# Altium PCB PCBRutero.PcbDoc
Units mil, origin at the board's own origin, x right, y up, seen from the top; angles counter-clockwise.
Board outline 6000 x 4000 mil, 2 copper layers (Top Layer, Bottom Layer); 66 components, 49 nets, 534 pads, 0 vias.
Unrouted connection lines stored in the file: 166.
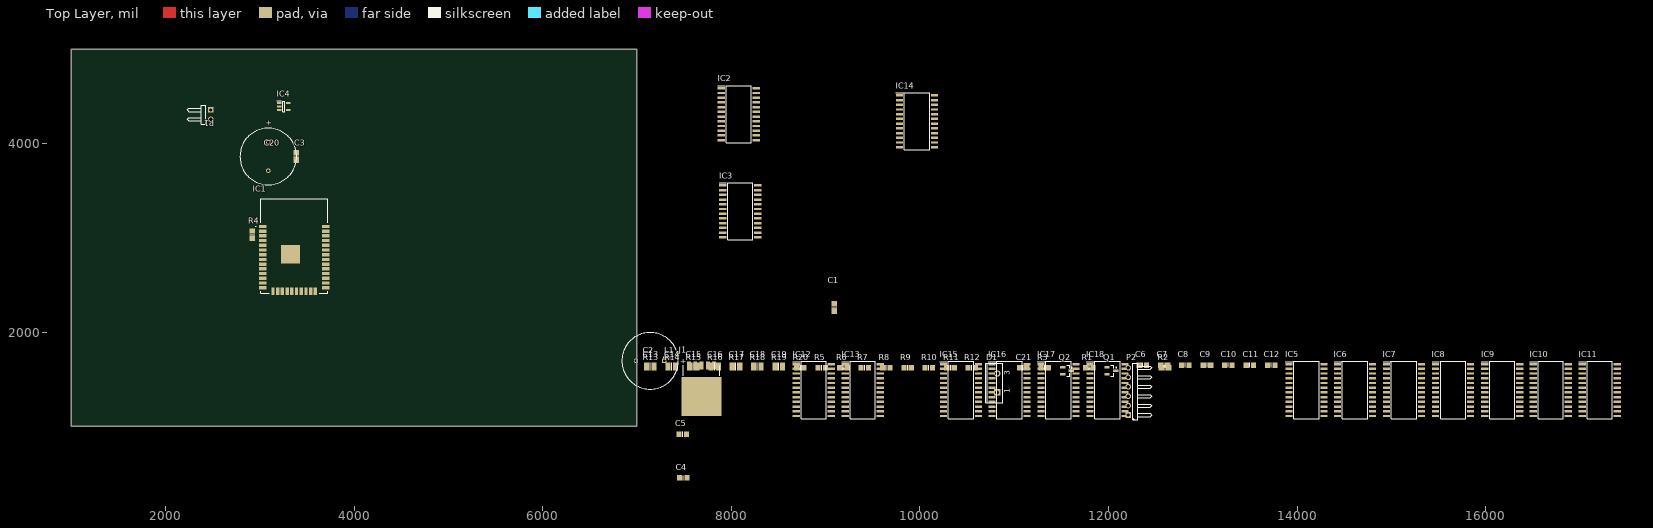
[diagram p0: Top Layer view]
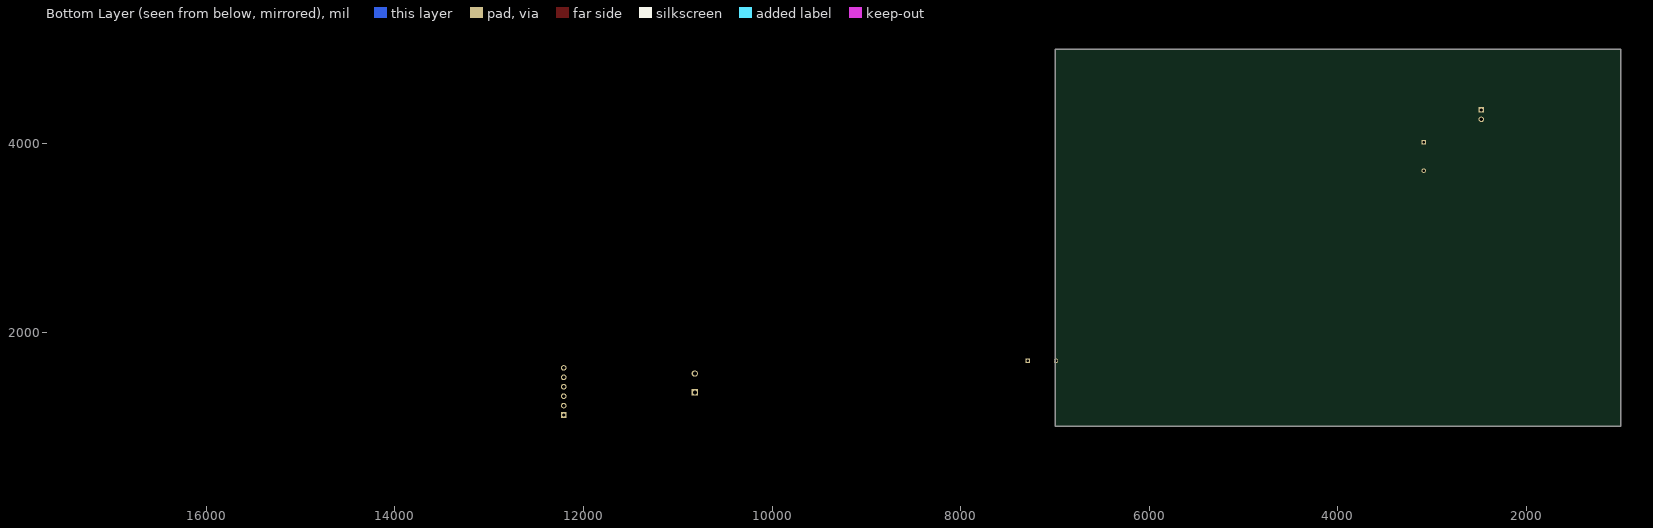
[diagram p1: Bottom Layer view, seen from below]

## Layer stack, top to bottom
Top Solder: solder mask 0.4, Solder Resist, Dk 3.5
Top Layer: signal copper 1.4
Dielectric 1: dielectric 12.6, FR-4, Dk 4.8
Bottom Layer: signal copper 1.4
Bottom Solder: solder mask 0.4, Solder Resist, Dk 3.5

## Board outline
1000,1000 7000,1000 7000,5000 1000,5000

## Design rules (kind name [scope] priority, off if disabled: settings)
Clearance Clearance_1 [All] p1: gap=10 ignorepadtopadclearanceinfootprint=FALSE except(0: Arc-Hole Track-Hole SMDPad-Hole THPad-Hole Via-Hole Fill-Hole Poly-Hole Region-Hole Text-Hole)
Clearance [All] p2: gap=10 ignorepadtopadclearanceinfootprint=FALSE except(0: Arc-Hole Track-Hole SMDPad-Hole THPad-Hole Via-Hole Fill-Hole Poly-Hole Region-Hole Text-Hole)
PolygonConnect [All] p1: connectstyle=Relief reliefconductorwidth=10 reliefentries=4 polygonreliefangle="90 Angle" airgapwidth=10
RoomDefinition Power [InComponentClass('Power')] p1: confinementstyle=ConfineOut formatcopy=TRUE lockcomponents=FALSE outline 3735,6510 8190,6510 8190,5410 3735,5410
RoomDefinition main [InComponentClass('main')] p2: confinementstyle=ConfineIn formatcopy=TRUE lockcomponents=FALSE outline 2988.59,3739.63 3975,3739.63 3975,2268.11 3924.75,2205 2740,2205 2740,3460.6 2972.72,3752.91
RoutingVias [All] p1: holewidth=28 width=50 viastyle="Through Hole" minholewidth=28 minwidth=50 maxholewidth=28 maxwidth=50
SolderMaskExpansion [All] p1: expansion=4
Width [All] p1: maxlimit=10 minlimit=10 preferedwidth=10
30 further rules are at their usual default settings.

## Classes and differential pairs
component class Matriz: IC5 IC6 IC7 IC8 IC9 IC10 IC11 IC12 IC13 IC14 IC15 IC16 IC17 IC18
component class Power: IC4

## Components (designator, comment, footprint, x,y, rotation, side; value= is the part's Value field where it differs from the comment)
C1 "Cap" 6-0805_M 9090.51,2260 r90 top value=0.1uF
C2 "Cap Pol1" RB7.6-15 7140,1695 r0 top value=1000uF
C3 "Cap" 6-0805_M 3385.67,3861.18 r90 top value=1uF
C4 "Cap" 6-0805_M 7490.35,452.91 r0 top value=0.1uF
C5 "Cap" 6-0805_M 7485.35,917.91 r0 top value=0.1uF
C6 "Cap" 6-0805_M 12365,1650 r0 top value=0.1uF
C7 "Cap" 6-0805_M 12590,1650 r0 top value=0.1uF
C8 "Cap" 6-0805_M 12815,1650 r0 top value=0.1uF
C9 "Cap" 6-0805_M 13045,1650 r0 top value=0.1uF
C10 "Cap" 6-0805_M 13270,1650 r0 top value=0.1uF
C11 "Cap" 6-0805_M 13500,1650 r0 top value=0.1uF
C12 "Cap" 6-0805_M 13725,1650 r0 top value=0.1uF
C13 "Cap" 6-0805_M 7140,1650 r0 top value=0.1uF
C14 "Cap" 6-0805_M 7370,1650 r0 top value=0.1uF
C15 "Cap" 6-0805_M 7595,1650 r0 top value=0.1uF
C16 "Cap" 6-0805_M 7825,1650 r0 top value=0.1uF
C17 "Cap" 6-0805_M 8050,1650 r0 top value=0.1uF
C18 "Cap" 6-0805_M 8275,1650 r0 top value=0.1uF
C19 "Cap" 6-0805_M 8505,1650 r0 top value=0.1uF
C20 "Cap Pol1" RB7.6-15 3090.67,3861.18 r90 top value=100uF
C21 "Cap" 6-0805_M 11095,1620 r0 top value=4.7uF
D1 "1N5824" TO-220AC 10820,1460 r90 top
IC1 "ESP-WROOM-32D" ESPWROOM32D 3365.35,2912.91 r0 top
IC2 "MAX7219CWG+T" SOIC127P1032X265-24N 8080,4310 r0 top
IC3 "MAX7219CWG+T" SOIC127P1032X265-24N 8095,3280 r0 top
IC4 "PTLV75733PDBVR" SOT95P280X145-5N 3254.21,4392.4 r0 top
IC5 "MAX7219CWG+T" SOIC127P1032X265-24N 14100,1385 r0 top
IC6 "MAX7219CWG+T" SOIC127P1032X265-24N 14615,1385 r0 top
IC7 "MAX7219CWG+T" SOIC127P1032X265-24N 15135,1385 r0 top
IC8 "MAX7219CWG+T" SOIC127P1032X265-24N 15655,1385 r0 top
IC9 "MAX7219CWG+T" SOIC127P1032X265-24N 16175,1385 r0 top
IC10 "MAX7219CWG+T" SOIC127P1032X265-24N 16690,1385 r0 top
IC11 "MAX7219CWG+T" SOIC127P1032X265-24N 17210,1385 r0 top
IC12 "MAX7219CWG+T" SOIC127P1032X265-24N 8875,1385 r0 top
IC13 "MAX7219CWG+T" SOIC127P1032X265-24N 9395,1385 r0 top
IC14 "MAX7219CWG+T" SOIC127P1032X265-24N 9970,4235 r0 top
IC15 "MAX7219CWG+T" SOIC127P1032X265-24N 10435,1385 r0 top
IC16 "MAX7219CWG+T" SOIC127P1032X265-24N 10950,1385 r0 top
IC17 "MAX7219CWG+T" SOIC127P1032X265-24N 11470,1385 r0 top
IC18 "MAX7219CWG+T" SOIC127P1032X265-24N 11990,1385 r0 top
J1 "LM2596S-5.0_TR" LM2596S50TR 7685,1480 r90 top
L1 "Inductor" 0402-A 7325,1730 r0 top value=33uH
P1 "Header 2H" HDR1X2H 2480,4355 r270 top
P2 "Header 6H" HDR1X6H 12210,1120 r90 top
Q1 "2N3904" SOT23_M 12030,1590 r0 top
Q2 "2N3904" SOT23_M 11560,1590 r0 top
R1 "Res1" 6-0805_M 11795,1620 r0 top value=10K
R2 "Res1" 6-0805_M 12600,1620 r0 top value=10K
R3 "Res1" 6-0805_M 11325,1620 r0 top value=10K
R4 "Res1" 6-0805_M 2919.84,3032.91 r90 top value=10K
R5 "Res1" 6-0805_M 8960,1620 r0 top value=10K
R6 "Res1" 6-0805_M 9190,1620 r0 top value=10K
R7 "Res1" 6-0805_M 9415,1620 r0 top value=10K
R8 "Res1" 6-0805_M 9645,1620 r0 top value=10K
R9 "Res1" 6-0805_M 9870,1620 r0 top value=10K
R10 "Res1" 6-0805_M 10095,1620 r0 top value=10K
R11 "Res1" 6-0805_M 10325,1620 r0 top value=10K
R12 "Res1" 6-0805_M 10550,1620 r0 top value=10K
R13 "Res1" 6-0805_M 7140,1620 r0 top value=10K
R14 "Res1" 6-0805_M 7370,1620 r0 top value=10K
R15 "Res1" 6-0805_M 7595,1620 r0 top value=10K
R16 "Res1" 6-0805_M 7825,1620 r0 top value=10K
R17 "Res1" 6-0805_M 8050,1620 r0 top value=10K
R18 "Res1" 6-0805_M 8275,1620 r0 top value=10K
R19 "Res1" 6-0805_M 8505,1620 r0 top value=10K
R20 "Res1" 6-0805_M 8730,1620 r0 top value=10K

## Footprints (in the part's own frame and the unit in brackets; to place one, negate y for a bottom-side part, rotate by r counter-clockwise, add the part's x,y. Pads: shape width x height; smd on the part's side, far side on the other; paste and mask are expansions set on the pad)
6-0805_M [mm] "Chip Resistor, Body 2.0x1.2mm, IPC Low Density"
  rect 1.4x1.5 smd: 1(-1,0) 2(1,0)
  silkscreen extent 0,-0.65 0,0.65, body extent -1.07,-0.7 1.07,0.7, height 0.7
0402-A [mm] "Chip Inductor, Body 1.0x0.5mm, IPC High Density"
  rect 0.6x0.5 smd: 1(-0.5,0) 2(0.5,0)
  silkscreen extent -1.1,-0.15 -1.1,0.15, body extent -0.55,-0.3 0.55,0.3, height 0.55
ESPWROOM32D [mm]
  rect 2x0.9 smd: 1(-8.5,5.26) 2(-8.5,3.99) 3(-8.5,2.72) 4(-8.5,1.45) 5(-8.5,0.18) 6(-8.5,-1.09) 7(-8.5,-2.36) 8(-8.5,-3.63) 9(-8.5,-4.9) 10(-8.5,-6.17) 11(-8.5,-7.44) 12(-8.5,-8.71) 13(-8.5,-9.98) 14(-8.5,-11.25) 25(8.5,-11.25) 26(8.5,-9.98) 27(8.5,-8.71) 28(8.5,-7.44) 29(8.5,-6.17) 30(8.5,-4.9) 31(8.5,-3.63) 32(8.5,-2.36) 33(8.5,-1.09) 34(8.5,0.18) 35(8.5,1.45) 36(8.5,2.72) 37(8.5,3.99) 38(8.5,5.26)
  rect 0.9x2 smd: 15(-5.715,-12.25) 16(-4.445,-12.25) 17(-3.175,-12.25) 18(-1.905,-12.25) 19(-0.635,-12.25) 20(0.635,-12.25) 21(1.905,-12.25) 22(3.175,-12.25) 23(4.445,-12.25) 24(5.715,-12.25)
  rect 5x5 smd: 39(-1,-2.24)
  silkscreen extent -10.4,-12.75 9,12.75, body extent -9,-12.75 9,12.75, height 3.3
HDR1X2H [mm] "Connector; Header; 2 Position; Right Angle"
  rect 1.5x1.5 hole 0.9: 1(0,0)
  round 1.5 hole 0.9: 2(2.54,0)
  silkscreen extent -1.27,-6.35 3.81,-1.27
HDR1X6H [mm] "Connector; Header; 6 Position; Right Angle"
  rect 1.5x1.5 hole 0.9: 1(0,0)
  round 1.5 hole 0.9: 2(2.54,0) 3(5.08,0) 4(7.62,0) 5(10.16,0) 6(12.7,0)
  silkscreen extent -1.27,-6.35 13.97,-1.27
LM2596S50TR [mm]
  rect 2.16x1.07 smd: 1(4.162,-3.4) 2(4.162,-1.7) 3(4.162,0) 4(4.162,1.7) 5(4.162,3.4)
  rect 10.41x10.8 smd: 6(-4.162,0)
  silkscreen extent 1.5,-4.95 5.8,4.95, body extent -8.33,-4.95 5.14,4.95, height 4.75
RB7.6-15 [mm] "Polarized Capacitor (Radial); 2 Leads"
  rect 1.2x1.2 hole 0.7: 1(3.81,0)
  round 1.2 hole 0.7: 2(-3.81,0)
  silkscreen extent -7.62,-7.62 7.62,7.62
SOIC127P1032X265-24N [mm]
  rect 1.925x0.65 smd: 1(-4.712,6.985) 2(-4.712,5.715) 3(-4.712,4.445) 4(-4.712,3.175) 5(-4.712,1.905) 6(-4.712,0.635) 7(-4.712,-0.635) 8(-4.712,-1.905) 9(-4.712,-3.175) 10(-4.712,-4.445) 11(-4.712,-5.715) 12(-4.712,-6.985) 13(4.712,-6.985) 14(4.712,-5.715) 15(4.712,-4.445) 16(4.712,-3.175) 17(4.712,-1.905) 18(4.712,-0.635) 19(4.712,0.635) 20(4.712,1.905) 21(4.712,3.175) 22(4.712,4.445) 23(4.712,5.715) 24(4.712,6.985)
  silkscreen extent -5.68,-7.7 3.4,7.7, body extent -5.16,-7.7 5.16,7.7, height 2.65
SOT23_M [mm] "SOT23, 3-Leads, Body 2.9x1.3mm, Pitch 0.95mm, Lead Span 2.3mm - Reverse Pinning, IPC Low Density"
  rect 1.45x0.6 smd: 1(1.175,0) 2(-1.175,-0.95) 3(-1.175,0.95)
  silkscreen extent -0.1,-1.5 1.48,1.5, body extent -0.7,-1.5 0.7,1.5, height 1.1
SOT95P280X145-5N [mm]
  rect 1.2x0.6 smd: 1(-1.25,0.95) 2(-1.25,0) 3(-1.25,-0.95) 4(1.25,-0.95) 5(1.25,0.95)
  silkscreen extent -1.85,-1.45 0.3,1.5, body extent -1.4,-1.45 1.4,1.45, height 1.45
TO-220AC [mm] "TO, Thru-Hole, Vertical, Heatsink Mounted; 3 In-Line Leads (1 Absent); Pitch 2.54 mm"
  rect 1.7x1.7 hole 1.1: 1(-2.54,0)
  round 1.7 hole 1.1: 3(2.54,0)
  silkscreen extent -5.3,-1.45 5.3,3.15

## Part data
C1 C3 C4 C5 C6 C7 C8 C9 C10 C11 C12 C13 C14 C15 C16 C17 C18 C19 C21: "Capacitor", LatestRevisionDate=17-Jul-2002, LatestRevisionNote="Re-released for DXP Platform.", PackageDescription="Radial Cap, Thru-Hole; 2 Leads; 0.3 in Pin Spacing", PackageReference=RAD-0.3, Published=8-Jun-2000, Publisher="Altium Limited"
C2 C20: "Polarized Capacitor (Radial)", LatestRevisionDate=17-Jul-2002, LatestRevisionNote="Re-released for DXP Platform.", PackageDescription="Polarized Capacitor (Radial); 2 Leads", PackageReference=RB7.6-15, Published=8-Jun-2000, Publisher="Altium Limited"
D1: library part "Diode 10TQ040", "Schottky Rectifier", ComponentLink1Description="Manufacturer Link", ComponentLink1URL=http://www.irf.com/, DatasheetVersion=PD-2.057B, LatestRevisionDate=17-Jul-2002, LatestRevisionNote="Re-released for DXP Platform.", Note="Terminal 2 is the TAB and is electrically connected to the cathode", PackageDescription="TO, Thru-Hole, Vertical, Heatsink Mounted; 3 In-Line Leads (1 Absent); Pitch 2.54 mm", PackageReference=TO-220AC, PackageVersion=Feb-1998, Published=8-Jun-2000, Publisher="Altium Limited"
IC1: "Integrated Circuit", Manufacturer_Name="Espressif Systems", Mouser Part Number=356-ESP-WROOM-32D, Arrow Part Number=ESP-WROOM-32D, Datasheet Link=https://componentsearchengine.com/Datasheets/1/ESP-WROOM-32D.pdf, Height=3.2mm, Manufacturer_Part_Number=ESP-WROOM-32D, Mouser Price/Stock=https://www.mouser.com/Search/Refine.aspx?Keyword=356-ESP-WROOM-32D
IC2 IC3 IC5 IC6 IC7 IC8 IC9 IC10 IC11 IC12 IC13 IC14 IC15 IC16 IC17 IC18: "Integrated Circuit", Manufacturer_Name="Maxim Integrated", Mouser2 Part Number=700-MAX7219CWGT, Datasheet Link=https://componentsearchengine.com//MAX7219CWG+T.pdf, Height=2.65mm, Manufacturer_Part_Number=MAX7219CWG+T, Mouser2 Price/Stock=https://www.mouser.com/Search/Refine.aspx?Keyword=700-MAX7219CWGT
IC4: "Integrated Circuit", Manufacturer_Name="Texas Instruments", Mouser Part Number=595-PTLV75733PDBVR, Arrow Part Number=PTLV75733PDBVR, Arrow Price/Stock=https://www.arrow.com/en/products/ptlv75733pdbvr/texas-instruments, Datasheet Link=http://www.ti.com/lit/ds/symlink/tlv757p.pdf, Height=1.45mm, Manufacturer_Part_Number=PTLV75733PDBVR, Mouser Price/Stock=https://www.mouser.co.uk/ProductDetail/Texas-Instruments/PTLV75733PDBVR?qs=chTDxNqvsymJRvDJcx2n%252Bw%3D%3D
J1: "Connector", Arrow Part Number=LM2596S-5.0/TR, Manufacturer_Name="National Electronics", Datasheet Link=https://www.jameco.com/Jameco/Products/ProdDS/895246.pdf, Height=4.65mm, Manufacturer_Part_Number=LM2596S-5.0/TR
P1: "Header, 2-Pin, Right Angle", LatestRevisionDate=17-Jul-2002, LatestRevisionNote="Re-released for DXP Platform.", Publisher="Altium Limited"
P2: "Header, 6-Pin, Right Angle", LatestRevisionDate=17-Jul-2002, LatestRevisionNote="Re-released for DXP Platform.", Publisher="Altium Limited"
Q1 Q2: "NPN General Purpose Amplifier", ComponentLink1Description="Manufacturer Link", ComponentLink1URL=http://www.fairchildsemi.com/, ComponentLink2Description=Datasheet, ComponentLink2URL=http://www.fairchildsemi.com/ds/2N%2F2N3904.pdf, DatasheetVersion=1997, LatestRevisionDate=15-Jan-2003, LatestRevisionNote="PCB Footprint 'BCY-W3/D4.7' replaced", PackageDescription="TO, Flat Index; 3 In-Line, Axial Leads; Body Dia. 4.5mm; Leads 0.51 x 0.48 mm (max)", PackageReference=TO-92A, PackageVersion=Sep-1998, Published=8-Jun-2000, Publisher="Altium Limited"
R1 R2 R3 R4 R5 R6 R7 R8 R9 R10 R11 R12 R13 R14 R15 R16 R17 R18 R19 R20: "Resistor", LatestRevisionDate=17-Jul-2002, LatestRevisionNote="Re-released for DXP Platform.", PackageDescription="Axial Device, Thru-Hole; 2 Leads; 0.3 in Pin Spacing", PackageReference=AXIAL-0.3, Published=8-Jun-2000, Publisher="Altium Limited"
L1: Code_IEC=1005, Code_JEITA=0402, LatestRevisionDate=29-May-2009, LatestRevisionNote="IPC-7351 Footprint Added.", PackageDescription="Chip Inductor", PackageReference=0402-A, Published=8-Jun-2000, Publisher="Altium Limited"

## Nets (pads, with @x,y where several pads share a name; then routed paths per layer and width w, separated by ;. In a path a pad name is that pad's centre, name@x,y a point inside that pad or via, vN(x,y) a via of type N, cw(c..) or ccw(c..) an arc to the next point about the centre after c; other vN are vias at no path point)
3.3V: C3.2 IC1.2 IC4.5 R4.2
5V: C4.1 C5.1 C6.1 C7.1 C8.1 C9.1 C10.1 C11.1 C12.1 C13.1 C14.1 C15.1 C16.1 C17.1 C18.1 C19.1 C20.1 C21.2 IC2.19 IC3.19 IC4.1 IC4.3 IC5.19 IC6.19 IC7.19 IC8.19 IC9.19 IC10.19 IC11.19 IC12.19 IC13.19 IC14.19 IC15.19 IC16.19 IC17.19 IC18.19 J1.4 L1.2 R5.2 R6.2 R7.2 R8.2 R9.2 R10.2 R11.2 R12.2 R13.2 R14.2 R15.2 R16.2 R17.2 R18.2 R19.2 R20.2
12V: C2.1 J1.1 P1.2
CK1: IC2.13 IC5.13 IC6.13 IC7.13 IC8.13 IC9.13 IC10.13 IC11.13
CKL2: IC3.13 IC12.13 IC13.13 IC14.13 IC15.13 IC16.13 IC17.13 IC18.13
CS1: IC2.12 IC5.12 IC6.12 IC7.12 IC8.12 IC9.12 IC10.12 IC11.12
CS2: IC3.12 IC12.12 IC13.12 IC14.12 IC15.12 IC16.12 IC17.12 IC18.12
DO1: IC2.1 IC5.24 IC6.1 IC6.24 IC7.1
DO2: IC3.1 IC3.24 IC12.1 IC12.24 IC13.1 IC13.24 IC14.1 IC14.24 IC15.1 IC15.24 IC16.1 IC16.24 IC17.1 IC17.24 IC18.1
EN: C1.2 IC1.3 R4.1
GND: C1.1 C2.2 C3.1 C4.2 C5.2 C6.2 C7.2 C8.2 C9.2 C10.2 C11.2 C12.2 C13.2 C14.2 C15.2 C16.2 C17.2 C18.2 C19.2 C20.2 C21.1 D1.3 IC1.1 IC4.2 J1.3 J1.5 J1.6 P1.1
NetD1_1: D1.1 J1.2 L1.1
NetIC1_24: IC1.24 R1.2
NetIC1_25: IC1.25 Q2.3
NetIC1_26: IC1.26
NetIC1_27: IC1.27
NetIC1_28: IC1.28
NetIC1_29: IC1.29
NetIC1_30: IC1.30
NetIC1_31: IC1.31
NetIC2_18: IC2.18 R5.1
NetIC2_24: IC2.24 IC5.1
NetIC3_18: IC3.18 R13.1
NetIC5_18: IC5.18 R6.1
NetIC6_18: IC6.18 R7.1
NetIC7_18: IC7.18 R8.1
NetIC7_24: IC7.24 IC8.1
NetIC8_18: IC8.18 R9.1
NetIC8_24: IC8.24 IC9.1
NetIC9_18: IC9.18 R10.1
NetIC9_24: IC9.24 IC10.1
NetIC10_18: IC10.18 R11.1
NetIC10_24: IC10.24 IC11.1
NetIC11_18: IC11.18 R12.1
NetIC12_18: IC12.18 R14.1
NetIC13_18: IC13.18 R15.1
NetIC14_18: IC14.18 R16.1
NetIC15_18: IC15.18 R17.1
NetIC16_18: IC16.18 R18.1
NetIC17_18: IC17.18 R19.1
NetIC18_18: IC18.18 R20.1
NetP2_1: P2.1
NetP2_2: P2.2 Q1.1 R3.1
NetP2_6: P2.6 Q2.1 R2.1
NetQ1_2: Q1.2 R2.2
NetQ1_3: Q1.3 R1.1
NetQ2_2: Q2.2 R3.2
RX: IC1.34 P2.4
TX: IC1.35 P2.5
pads on no net: IC1.4 IC1.5 IC1.6 IC1.7 IC1.8 IC1.9 IC1.10 IC1.11 IC1.12 IC1.13 IC1.14 IC1.15 IC1.16 IC1.17 IC1.18 IC1.19 IC1.20 IC1.21 IC1.22 IC1.23 IC1.32 IC1.33 IC1.36 IC1.37 IC1.38 IC1.39 IC2.2 IC2.3 IC2.4 IC2.5 IC2.6 IC2.7 IC2.8 IC2.9 IC2.10 IC2.11 IC2.14 IC2.15 IC2.16 IC2.17 IC2.20 IC2.21 IC2.22 IC2.23 IC3.2 IC3.3 IC3.4 IC3.5 IC3.6 IC3.7 IC3.8 IC3.9 IC3.10 IC3.11 IC3.14 IC3.15 IC3.16 IC3.17 IC3.20 IC3.21 IC3.22 IC3.23 IC4.4 IC5.2 IC5.3 IC5.4 IC5.5 IC5.6 IC5.7 IC5.8 IC5.9 IC5.10 IC5.11 IC5.14 IC5.15 IC5.16 IC5.17 IC5.20 IC5.21 IC5.22 IC5.23 IC6.2 IC6.3 IC6.4 IC6.5 IC6.6 IC6.7 IC6.8 IC6.9 IC6.10 IC6.11 IC6.14 IC6.15 IC6.16 IC6.17 IC6.20 IC6.21 IC6.22 IC6.23 IC7.2 IC7.3 IC7.4 IC7.5 IC7.6 IC7.7 IC7.8 IC7.9 IC7.10 IC7.11 IC7.14 IC7.15 IC7.16 IC7.17 IC7.20 IC7.21 IC7.22 IC7.23 IC8.2 IC8.3 IC8.4 IC8.5 IC8.6 IC8.7 IC8.8 IC8.9 IC8.10 IC8.11 IC8.14 IC8.15 IC8.16 IC8.17 IC8.20 IC8.21 IC8.22 IC8.23 IC9.2 IC9.3 IC9.4 IC9.5 IC9.6 IC9.7 IC9.8 IC9.9 IC9.10 IC9.11 IC9.14 IC9.15 IC9.16 IC9.17 IC9.20 IC9.21 IC9.22 IC9.23 IC10.2 IC10.3 IC10.4 IC10.5 IC10.6 IC10.7 IC10.8 IC10.9 IC10.10 IC10.11 IC10.14 IC10.15 IC10.16 IC10.17 IC10.20 IC10.21 IC10.22 IC10.23 IC11.2 IC11.3 IC11.4 IC11.5 IC11.6 IC11.7 IC11.8 IC11.9 IC11.10 IC11.11 IC11.14 IC11.15 IC11.16 IC11.17 IC11.20 IC11.21 IC11.22 IC11.23 IC11.24 IC12.2 IC12.3 IC12.4 IC12.5 IC12.6 IC12.7 IC12.8 IC12.9 IC12.10 IC12.11 IC12.14 IC12.15 IC12.16 IC12.17 IC12.20 IC12.21 IC12.22 IC12.23 IC13.2 IC13.3 IC13.4 IC13.5 IC13.6 IC13.7 IC13.8 IC13.9 IC13.10 IC13.11 IC13.14 IC13.15 IC13.16 IC13.17 IC13.20 IC13.21 IC13.22 IC13.23 IC14.2 IC14.3 IC14.4 IC14.5 IC14.6 IC14.7 IC14.8 IC14.9 IC14.10 IC14.11 IC14.14 IC14.15 IC14.16 IC14.17 IC14.20 IC14.21 IC14.22 IC14.23 IC15.2 IC15.3 IC15.4 IC15.5 IC15.6 IC15.7 IC15.8 IC15.9 IC15.10 IC15.11 IC15.14 IC15.15 IC15.16 IC15.17 IC15.20 IC15.21 IC15.22 IC15.23 IC16.2 IC16.3 IC16.4 IC16.5 IC16.6 IC16.7 IC16.8 IC16.9 IC16.10 IC16.11 IC16.14 IC16.15 IC16.16 IC16.17 IC16.20 IC16.21 IC16.22 IC16.23 IC17.2 IC17.3 IC17.4 IC17.5 IC17.6 IC17.7 IC17.8 IC17.9 IC17.10 IC17.11 IC17.14 IC17.15 IC17.16 IC17.17 IC17.20 IC17.21 IC17.22 IC17.23 IC18.2 IC18.3 IC18.4 IC18.5 IC18.6 IC18.7 IC18.8 IC18.9 IC18.10 IC18.11 IC18.14 IC18.15 IC18.16 IC18.17 IC18.20 IC18.21 IC18.22 IC18.23 IC18.24 P2.3

## Text inside footprints (layer, text, board x,y; h text height)
C2: Top Overlay "+" at 7460.15,1665.99 h59.06
C20: Top Overlay "+" at 3119.68,4181.33 h59.06 r90
D1: Top Overlay "3" at 10954.84,1540.32 h59.06 r90; Top Overlay "1" at 10954.84,1350.16 h59.06 r90